# Altium PCB PCB1.PcbDoc (part 1 of 3)
Units mil, origin at the board's own origin, x right, y up, seen from the top; angles counter-clockwise.
Board outline 3935 x 3335 mil, 2 copper layers (Top Layer, Bottom Layer); 149 components, 220 nets, 928 pads, 357 vias.
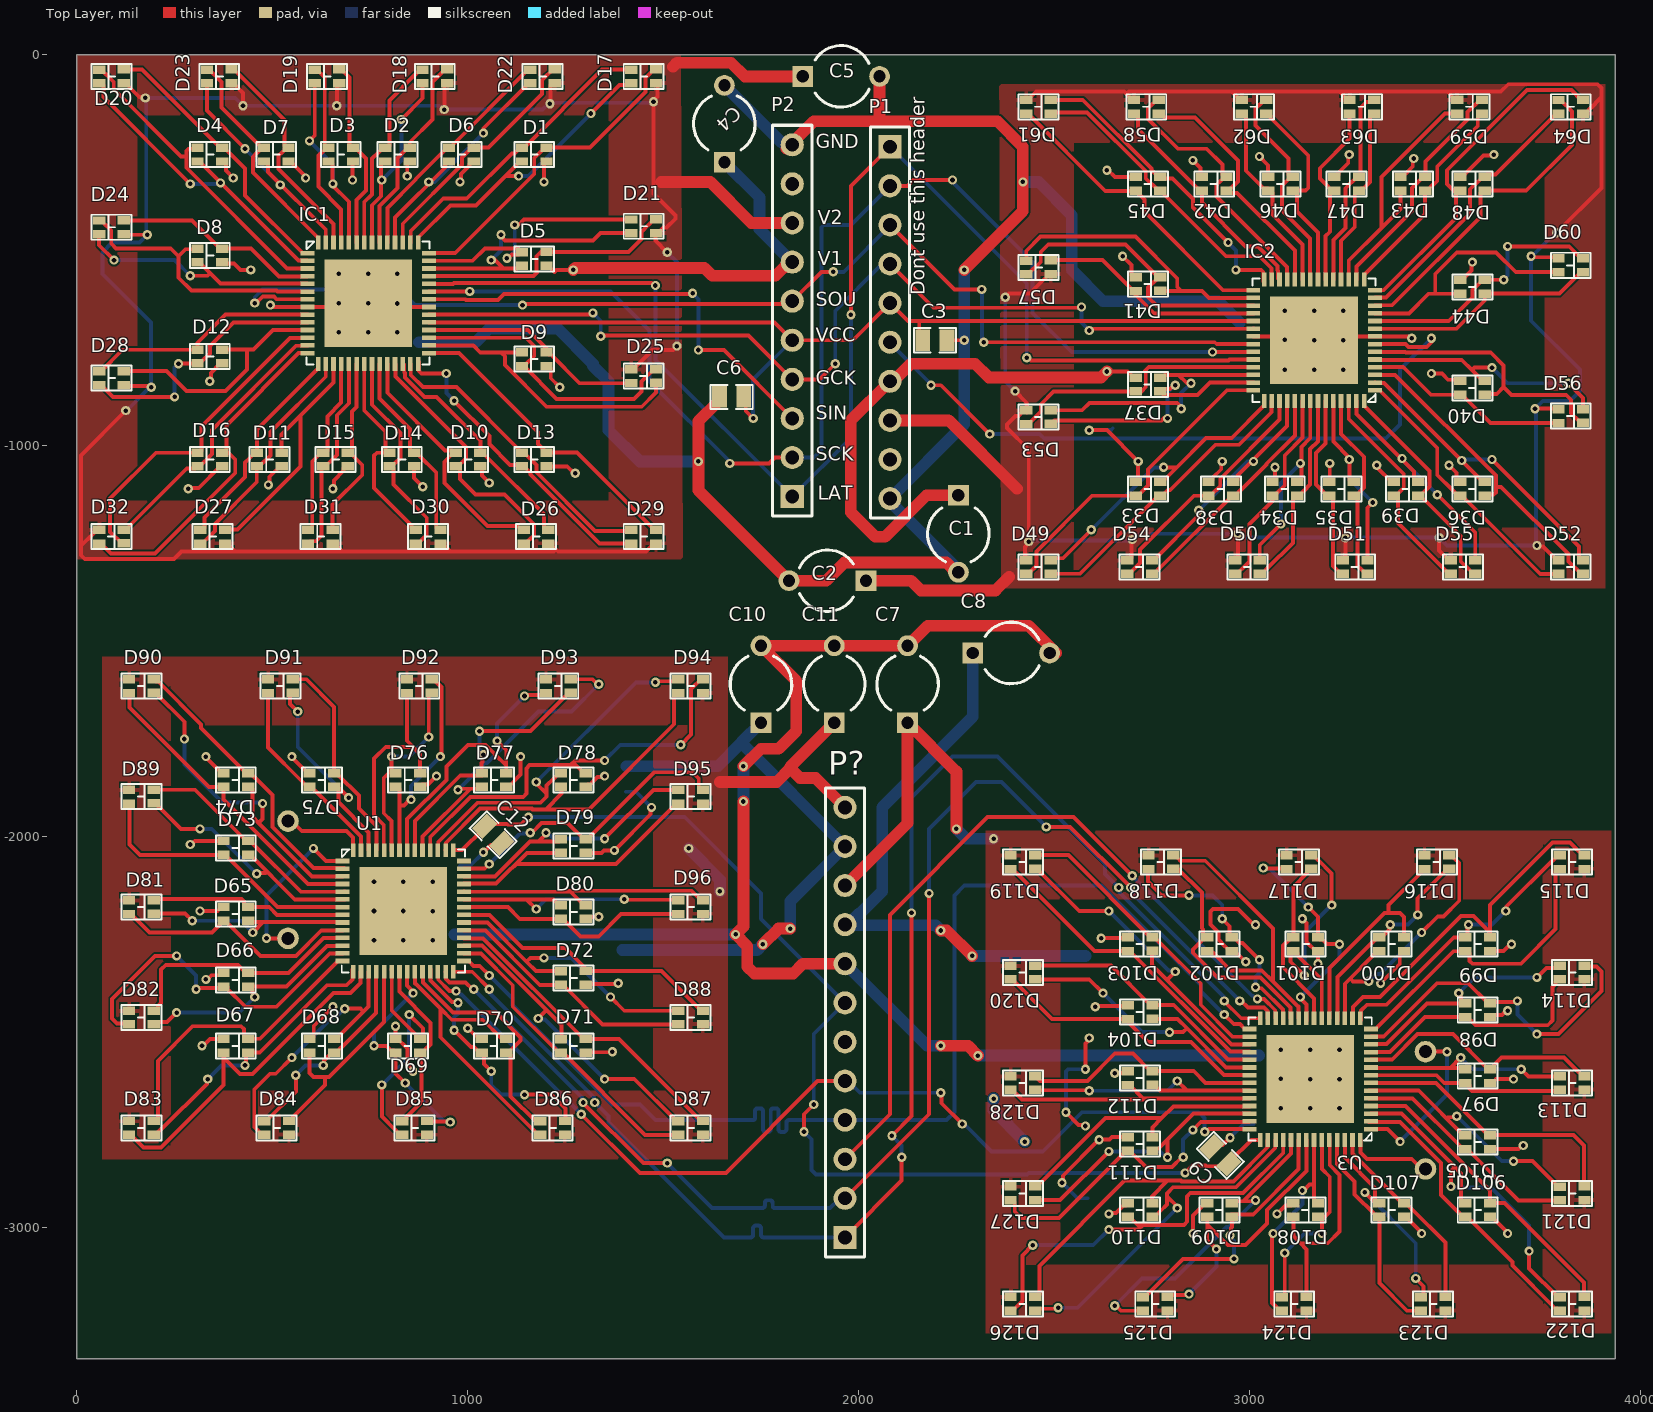
[diagram p0: Top Layer view]
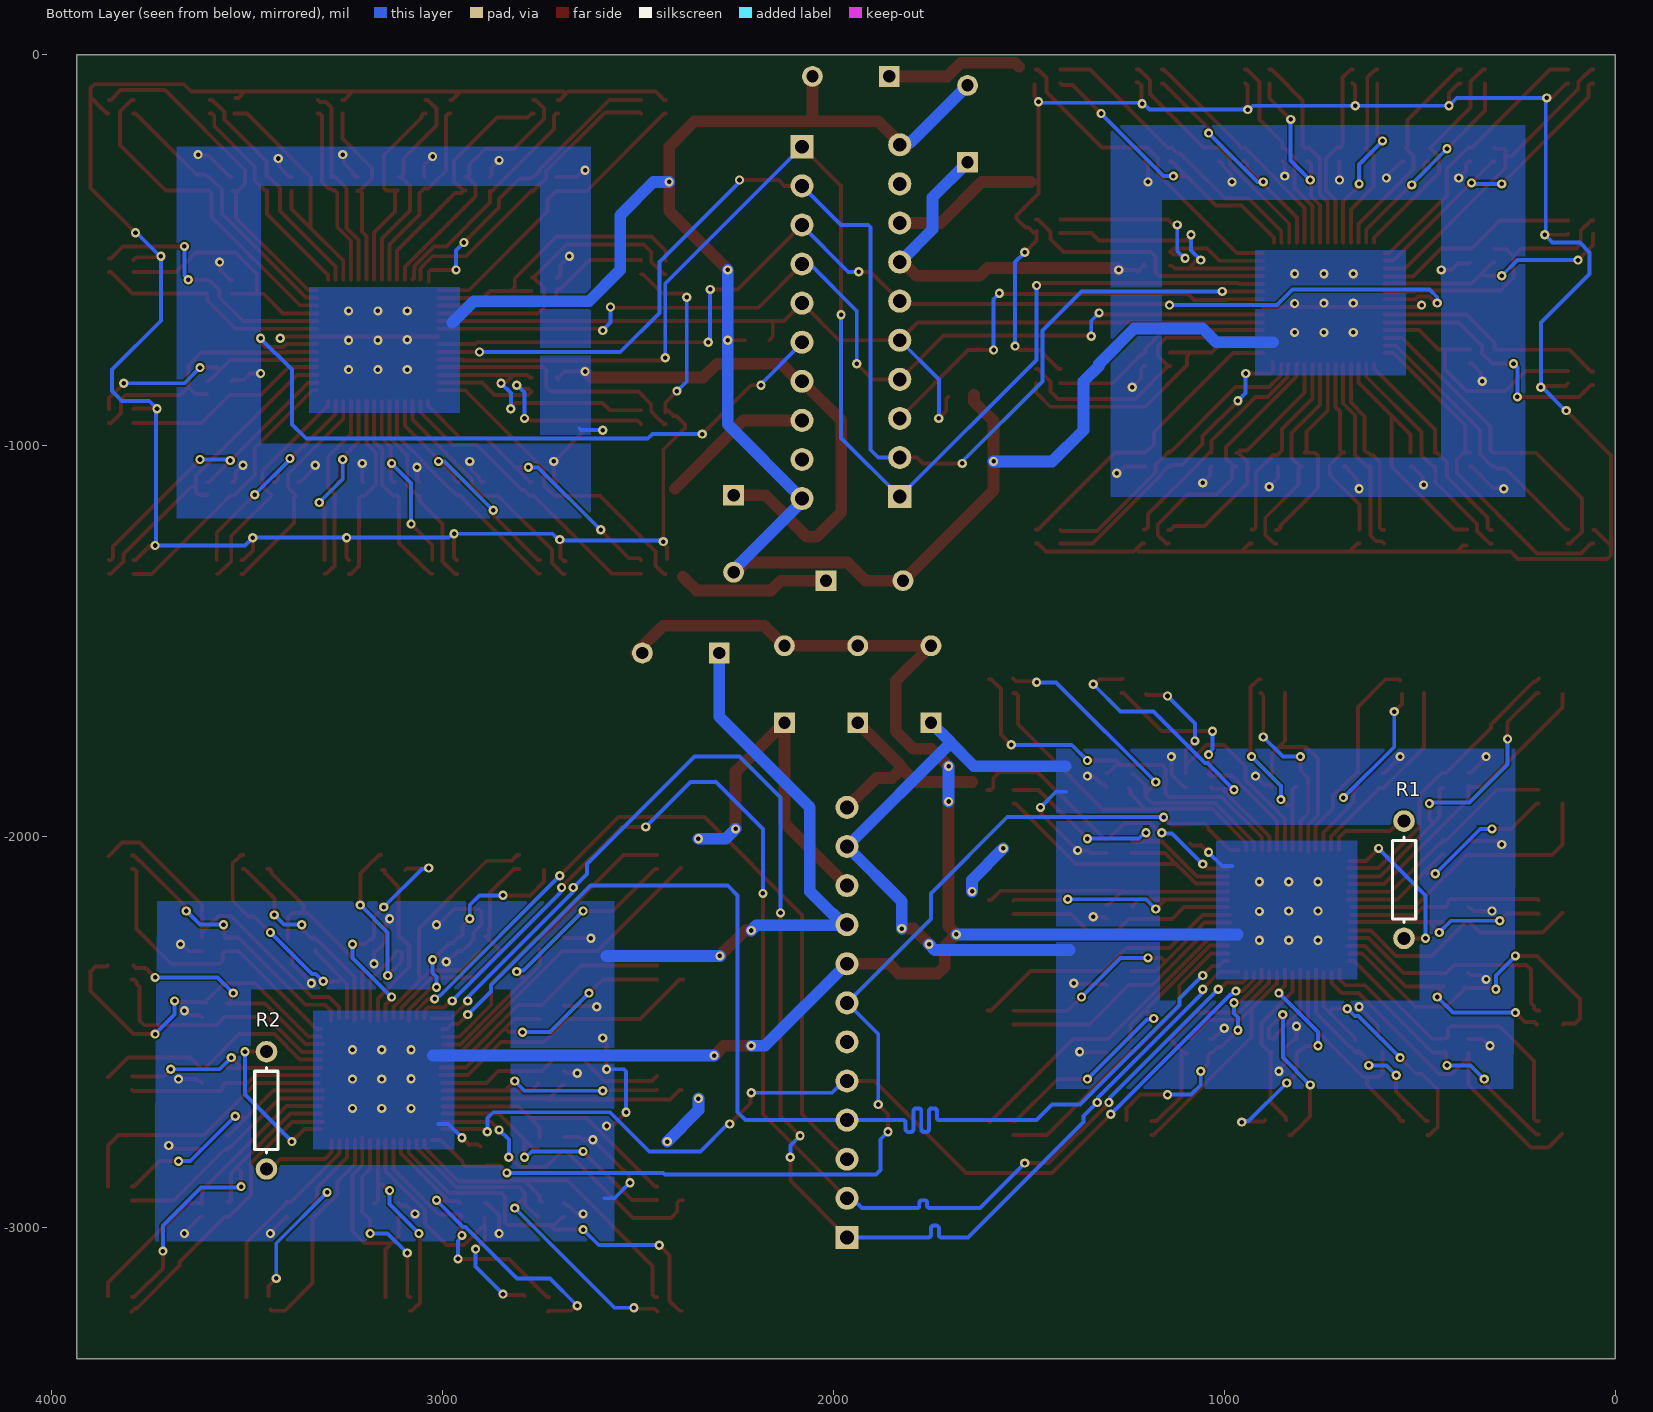
[diagram p1: Bottom Layer view, seen from below]

## Layer stack, top to bottom
Top Solder: solder mask 0.4, Solder Resist, Dk 3.5
Top Layer: signal copper 1.4
Dielectric 1: dielectric 12.6, FR-4, Dk 4.8
Bottom Layer: signal copper 1.4
Bottom Solder: solder mask 0.4, Solder Resist, Dk 3.5

## Board outline
0,-3335 0,0 3935,0 3935,-3335

## Design rules (kind name [scope] priority, off if disabled: settings)
Clearance [All] p1: gap=5 ignorepadtopadclearanceinfootprint=FALSE except(0: Arc-Text Track-Text SMDPad-Text THPad-Text Via-Text Fill-Text Poly-Text Region-Text Text-Text)
MinimumSolderMaskSliver [All] p1: minsoldermaskwidth=0
PolygonConnect [All] p1: thpad.connectstyle=Relief thpad.reliefconductorwidth=10 thpad.reliefentries=4 thpad.polygonreliefangle="90 Angle" thpad.airgapwidth=10 smdpad.connectstyle=Relief smdpad.reliefconductorwidth=10 smdpad.reliefentries=4 smdpad.polygonreliefangle="90 Angle" smdpad.airgapwidth=10 via.connectstyle=Direct via.reliefconductorwidth=10 via.reliefentries=4 via.polygonreliefangle="90 Angle" via.airgapwidth=10
RoutingVias [All] p1: holewidth=11.81 width=23.62 viastyle="Through Hole" minholewidth=11.81 minwidth=23.62 maxholewidth=11.81 maxwidth=23.62
SilkToSilkClearance [All] p1: silktosilkclearance=0
SilkToSolderMaskClearance [IsPad] p1: minsilkscreentomaskgap=0 clearancetoexposedcopper=TRUE
SolderMaskExpansion [All] p1: expansion=4
UnConnectedPin UnConnectedPin_1 [InNet('+VIN_2')] p1:
UnConnectedPin [InNet('+VIN_1')] p2:
Width [All] p1: maxlimit=50 minlimit=10 preferedwidth=10
27 further rules are at their usual default settings.

## Classes and differential pairs
component class TLC59581: C7 C8 C9 D97 D98 D99 D100 D101 D102 D103 D104 D105 D106 D107 D108 D109 D110 D111 D112 D113 D114 D115 D116 D117 D118 D119 D120 D121 D122 D123 D124 D125 D126 D127 D128 P? R2 U3
component class Sheet3: C10 C11 C12 D65 D66 D67 D68 D69 D70 D71 D72 D73 D74 D75 D76 D77 D78 D79 D80 D81 D82 D83 D84 D85 D86 D87 D88 D89 D90 D91 D92 D93 D94 D95 D96 R1 U1
component class Sheet1: C1 C2 C3 D33 D34 D35 D36 D37 D38 D39 D40 D41 D42 D43 D44 D45 D46 D47 D48 D49 D50 D51 D52 D53 D54 D55 D56 D57 D58 D59 D60 D61 D62 D63 D64 IC2 P1
component class TLC5955: C4 C5 C6 D1 D2 D3 D4 D5 D6 D7 D8 D9 D10 D11 D12 D13 D14 D15 D16 D17 D18 D19 D20 D21 D22 D23 D24 D25 D26 D27 D28 D29 D30 D31 D32 IC1 P2

## Components (designator, comment, footprint, x,y, rotation, side; value= is the part's Value field where it differs from the comment)
C1 "Cap2" CAPR5-4X5 2255,-1225 r270 top value=100pF
C2 "Cap2" CAPR5-4X5 1920,-1345 r180 top value=100pF
C3 "0805 Capacitor" "0805 Capacitor" 2195,-730 r180 top
C4 "Cap2" CAPR5-4X5 1656.46,-176.46 r90 top value=100pF
C5 "Cap2" CAPR5-4X5 1955,-55 r0 top value=100pF
C6 "0805 Capacitor" "0805 Capacitor" 1675,-875 r0 top
C7 "Cap2" CAPR5-4X5 2125,-1610 r90 top value=100pF
C8 "Cap2" CAPR5-4X5 2390,-1530 r0 top value=100pF
C9 "0805 Capacitor" "0805 Capacitor" 2925,-2815 r315 top
C10 "Cap2" CAPR5-4X5 1750,-1610 r90 top value=100pF
C11 "Cap2" CAPR5-4X5 1937.5,-1610 r90 top value=100pF
C12 "0805 Capacitor" "0805 Capacitor" 1065,-1995 r135 top
D1 "RGB 0603 LED" "RGB LED" 1170,-255 r0 top
D2 "RGB 0603 LED" "RGB LED" 820,-255 r0 top
D3 "RGB 0603 LED" "RGB LED" 675,-255 r0 top
D4 "RGB 0603 LED" "RGB LED" 340,-255 r0 top
D5 "RGB 0603 LED" "RGB LED" 1170,-521.67 r0 top
D6 "RGB 0603 LED" "RGB LED" 983.5,-255 r0 top
D7 "RGB 0603 LED" "RGB LED" 510,-255 r0 top
D8 "RGB 0603 LED" "RGB LED" 340,-513.33 r0 top
D9 "RGB 0603 LED" "RGB LED" 1170,-778.33 r0 top
D10 "RGB 0603 LED" "RGB LED" 1000.6,-1035 r0 top
D11 "RGB 0603 LED" "RGB LED" 492.4,-1035 r0 top
D12 "RGB 0603 LED" "RGB LED" 340,-771.67 r0 top
D13 "RGB 0603 LED" "RGB LED" 1170,-1035 r0 top
D14 "RGB 0603 LED" "RGB LED" 831.2,-1035 r0 top
D15 "RGB 0603 LED" "RGB LED" 661.8,-1035 r0 top
D16 "RGB 0603 LED" "RGB LED" 340,-1035 r0 top
D17 "RGB 0603 LED" "RGB LED" 1450,-55 r0 top
D18 "RGB 0603 LED" "RGB LED" 915.6,-55 r0 top
D19 "RGB 0603 LED" "RGB LED" 639.9,-55 r0 top
D20 "RGB 0603 LED" "RGB LED" 88.5,-55 r0 top
D21 "RGB 0603 LED" "RGB LED" 1450,-438.33 r0 top
D22 "RGB 0603 LED" "RGB LED" 1191.3,-55 r0 top
D23 "RGB 0603 LED" "RGB LED" 364.2,-55 r0 top
D24 "RGB 0603 LED" "RGB LED" 88.5,-440.91 r0 top
D25 "RGB 0603 LED" "RGB LED" 1450,-821.67 r180 top
D26 "RGB 0603 LED" "RGB LED" 1174.3,-1232.28 r0 top
D27 "RGB 0603 LED" "RGB LED" 347.2,-1232.28 r0 top
D28 "RGB 0603 LED" "RGB LED" 88.5,-826.81 r0 top
D29 "RGB 0603 LED" "RGB LED" 1450,-1232.28 r0 top
D30 "RGB 0603 LED" "RGB LED" 898.6,-1232.28 r0 top
D31 "RGB 0603 LED" "RGB LED" 622.9,-1232.28 r0 top
D32 "RGB 0603 LED" "RGB LED" 88.5,-1232.28 r180 top
D33 "RGB 0603 LED" "RGB LED" 2740,-1110 r180 top
D34 "RGB 0603 LED" "RGB LED" 3090,-1110 r180 top
D35 "RGB 0603 LED" "RGB LED" 3235,-1110 r180 top
D36 "RGB 0603 LED" "RGB LED" 3570,-1110 r180 top
D37 "RGB 0603 LED" "RGB LED" 2740,-843.33 r180 top
D38 "RGB 0603 LED" "RGB LED" 2926.5,-1110 r180 top
D39 "RGB 0603 LED" "RGB LED" 3400,-1110 r180 top
D40 "RGB 0603 LED" "RGB LED" 3570,-851.67 r180 top
D41 "RGB 0603 LED" "RGB LED" 2740,-586.67 r180 top
D42 "RGB 0603 LED" "RGB LED" 2909.4,-330 r180 top
D43 "RGB 0603 LED" "RGB LED" 3417.6,-330 r180 top
D44 "RGB 0603 LED" "RGB LED" 3570,-593.33 r180 top
D45 "RGB 0603 LED" "RGB LED" 2740,-330 r180 top
D46 "RGB 0603 LED" "RGB LED" 3078.8,-330 r180 top
D47 "RGB 0603 LED" "RGB LED" 3248.2,-330 r180 top
D48 "RGB 0603 LED" "RGB LED" 3570,-330 r180 top
D49 "RGB 0603 LED" "RGB LED" 2460,-1310 r180 top
D50 "RGB 0603 LED" "RGB LED" 2994.4,-1310 r180 top
D51 "RGB 0603 LED" "RGB LED" 3270.1,-1310 r180 top
D52 "RGB 0603 LED" "RGB LED" 3821.5,-1310 r180 top
D53 "RGB 0603 LED" "RGB LED" 2460,-926.67 r180 top
D54 "RGB 0603 LED" "RGB LED" 2718.7,-1310 r180 top
D55 "RGB 0603 LED" "RGB LED" 3545.8,-1310 r180 top
D56 "RGB 0603 LED" "RGB LED" 3821.5,-924.09 r180 top
D57 "RGB 0603 LED" "RGB LED" 2460,-543.33 r0 top
D58 "RGB 0603 LED" "RGB LED" 2735.7,-132.72 r180 top
D59 "RGB 0603 LED" "RGB LED" 3562.8,-132.72 r180 top
D60 "RGB 0603 LED" "RGB LED" 3821.5,-538.19 r180 top
D61 "RGB 0603 LED" "RGB LED" 2460,-132.72 r180 top
D62 "RGB 0603 LED" "RGB LED" 3011.4,-132.72 r180 top
D63 "RGB 0603 LED" "RGB LED" 3287.1,-132.72 r180 top
D64 "RGB 0603 LED" "RGB LED" 3821.5,-132.72 r0 top
D65 "RGB 0603 LED" "RGB LED" 406.5,-2197.5 r180 top
D66 "RGB 0603 LED" "RGB LED" 406.5,-2366.25 r180 top
D67 "RGB 0603 LED" "RGB LED" 406.5,-2535 r180 top
D68 "RGB 0603 LED" "RGB LED" 626.62,-2535 r180 top
D69 "RGB 0603 LED" "RGB LED" 846.75,-2535 r180 top
D70 "RGB 0603 LED" "RGB LED" 1066.87,-2535 r180 top
D71 "RGB 0603 LED" "RGB LED" 1270,-2535 r0 top
D72 "RGB 0603 LED" "RGB LED" 1270,-2361.25 r0 top
D73 "RGB 0603 LED" "RGB LED" 406.5,-2028.75 r180 top
D74 "RGB 0603 LED" "RGB LED" 406.5,-1855 r180 top
D75 "RGB 0603 LED" "RGB LED" 626.62,-1855 r180 top
D76 "RGB 0603 LED" "RGB LED" 846.75,-1855 r0 top
D77 "RGB 0603 LED" "RGB LED" 1066.87,-1855 r0 top
D78 "RGB 0603 LED" "RGB LED" 1270,-1855 r0 top
D79 "RGB 0603 LED" "RGB LED" 1270,-2023.75 r0 top
D80 "RGB 0603 LED" "RGB LED" 1270,-2192.5 r0 top
D81 "RGB 0603 LED" "RGB LED" 165,-2180 r180 top
D82 "RGB 0603 LED" "RGB LED" 165,-2462.5 r180 top
D83 "RGB 0603 LED" "RGB LED" 165,-2745 r180 top
D84 "RGB 0603 LED" "RGB LED" 511,-2745 r0 top
D85 "RGB 0603 LED" "RGB LED" 864,-2745 r0 top
D86 "RGB 0603 LED" "RGB LED" 1217,-2745 r0 top
D87 "RGB 0603 LED" "RGB LED" 1570,-2745 r0 top
D88 "RGB 0603 LED" "RGB LED" 1570,-2462.5 r0 top
D89 "RGB 0603 LED" "RGB LED" 165,-1897.5 r180 top
D90 "RGB 0603 LED" "RGB LED" 165,-1615 r180 top
D91 "RGB 0603 LED" "RGB LED" 520.5,-1615 r180 top
D92 "RGB 0603 LED" "RGB LED" 876,-1615 r180 top
D93 "RGB 0603 LED" "RGB LED" 1231.5,-1615 r180 top
D94 "RGB 0603 LED" "RGB LED" 1570,-1615 r0 top
D95 "RGB 0603 LED" "RGB LED" 1570,-1897.5 r0 top
D96 "RGB 0603 LED" "RGB LED" 1570,-2180 r0 top
D97 "RGB 0603 LED" "RGB LED" 3583.5,-2612.5 r0 top
D98 "RGB 0603 LED" "RGB LED" 3583.5,-2443.75 r0 top
D99 "RGB 0603 LED" "RGB LED" 3583.5,-2275 r0 top
D100 "RGB 0603 LED" "RGB LED" 3363.38,-2275 r0 top
D101 "RGB 0603 LED" "RGB LED" 3143.25,-2275 r0 top
D102 "RGB 0603 LED" "RGB LED" 2923.13,-2275 r0 top
D103 "RGB 0603 LED" "RGB LED" 2720,-2275 r180 top
D104 "RGB 0603 LED" "RGB LED" 2720,-2448.75 r180 top
D105 "RGB 0603 LED" "RGB LED" 3583.5,-2781.25 r0 top
D106 "RGB 0603 LED" "RGB LED" 3583.5,-2955 r0 top
D107 "RGB 0603 LED" "RGB LED" 3363.38,-2955 r0 top
D108 "RGB 0603 LED" "RGB LED" 3143.25,-2955 r180 top
D109 "RGB 0603 LED" "RGB LED" 2923.13,-2955 r180 top
D110 "RGB 0603 LED" "RGB LED" 2720,-2955 r180 top
D111 "RGB 0603 LED" "RGB LED" 2720,-2786.25 r180 top
D112 "RGB 0603 LED" "RGB LED" 2720,-2617.5 r180 top
D113 "RGB 0603 LED" "RGB LED" 3825,-2630 r0 top
D114 "RGB 0603 LED" "RGB LED" 3825,-2347.5 r0 top
D115 "RGB 0603 LED" "RGB LED" 3825,-2065 r0 top
D116 "RGB 0603 LED" "RGB LED" 3479,-2065 r180 top
D117 "RGB 0603 LED" "RGB LED" 3126,-2065 r180 top
D118 "RGB 0603 LED" "RGB LED" 2773,-2065 r180 top
D119 "RGB 0603 LED" "RGB LED" 2420,-2065 r180 top
D120 "RGB 0603 LED" "RGB LED" 2420,-2347.5 r180 top
D121 "RGB 0603 LED" "RGB LED" 3825,-2912.5 r0 top
D122 "RGB 0603 LED" "RGB LED" 3825,-3195 r0 top
D123 "RGB 0603 LED" "RGB LED" 3469.5,-3195 r0 top
D124 "RGB 0603 LED" "RGB LED" 3114,-3195 r0 top
D125 "RGB 0603 LED" "RGB LED" 2758.5,-3195 r0 top
D126 "RGB 0603 LED" "RGB LED" 2420,-3195 r180 top
D127 "RGB 0603 LED" "RGB LED" 2420,-2912.5 r180 top
D128 "RGB 0603 LED" "RGB LED" 2420,-2630 r180 top
IC1 "TLC5955" TLC5955 745,-635 r0 top
IC2 "TLC5955" TLC5955 3165,-730 r180 top
P1 "Header 10" HDR1X10 2080,-235 r270 top
P2 "Header 10" HDR1X10 1830,-1130 r90 top
P? "Header 12" HDR1X12 1965,-3025 r90 top
R1 "Res1" AXIAL-0.3 540,-2110 r90 bottom
R2 "Res1" AXIAL-0.3 3450,-2700 r270 bottom
U1 "TLC59581" TLC59581 835,-2190 r0 top
U3 "TLC59581" TLC59581 3155,-2620 r180 top (schematic designator IC3)

## Footprints (in the part's own frame and the unit in brackets; to place one, negate y for a bottom-side part, rotate by r counter-clockwise, add the part's x,y. Pads: shape width x height; smd on the part's side, far side on the other; paste and mask are expansions set on the pad)
"0805 Capacitor" [mm]
  rect 0.96x1.39 smd: 1(-0.79,0) 2(0.79,0)
  silkscreen extent -1.37,-0.79 1.37,0.79, body extent -1,-0.63 1,0.63, height 1.35
AXIAL-0.3 [mm] "Axial Device, Thru-Hole; 2 Leads; 0.3 in Pin Spacing"
  round 1.4 hole 0.85: 1(-3.81,0) 2(3.81,0)
  silkscreen extent -2.77,-0.76 2.77,0.76
CAPR5-4X5 [mm] "Capacitor; 2 Leads"
  rect 1.35x1.35 hole 0.8: 1(-2.5,0)
  round 1.35 hole 0.8: 2(2.5,0)
  silkscreen extent -1.69,-2 1.82,2
HDR1X10 [mm] "Connector; Header; 10 Position"
  rect 1.5x1.5 hole 0.9: 1(0,0)
  round 1.5 hole 0.9: 2(2.54,0) 3(5.08,0) 4(7.62,0) 5(10.16,0) 6(12.7,0) 7(15.24,0) 8(17.78,0) 9(20.32,0) 10(22.86,0)
  silkscreen extent -1.27,-1.27 24.13,1.27
HDR1X12 [mm] "Connector; Header; 12 Position"
  rect 1.5x1.5 hole 0.9: 1(0,0)
  round 1.5 hole 0.9: 2(2.54,0) 3(5.08,0) 4(7.62,0) 5(10.16,0) 6(12.7,0) 7(15.24,0) 8(17.78,0) 9(20.32,0) 10(22.86,0) 11(25.4,0) 12(27.94,0)
  silkscreen extent -1.27,-1.27 29.21,1.27
"RGB LED" [mm]
  rect 0.8x0.55 smd: 1(-0.8,-0.45) 2(-0.8,0.439) 3(0.8,0.45) 4(0.8,-0.45)
  round 0.381 on Top Overlay: ""(1.6,-0.66)
  silkscreen extent -1.3,-0.81 1.3,0.81
TLC5955 [mm]
  rect 0.9x0.3 smd: 1(-3.95,3.25) 2(-3.95,2.75) 3(-3.95,2.25) 4(-3.95,1.75) 5(-3.95,1.25) 6(-3.95,0.75) 7(-3.95,0.25) 8(-3.95,-0.25) 9(-3.95,-0.75) 10(-3.95,-1.25) 11(-3.95,-1.75) 12(-3.95,-2.25) 13(-3.95,-2.75) 14(-3.95,-3.25) 29(3.95,-3.25) 30(3.95,-2.75) 31(3.95,-2.25) 32(3.95,-1.75) 33(3.95,-1.25) 34(3.95,-0.75) 35(3.95,-0.25) 36(3.95,0.25) 37(3.95,0.75) 38(3.95,1.25) 39(3.95,1.75) 40(3.95,2.25) 41(3.95,2.75) 42(3.95,3.25)
  rect 0.3x0.9 smd: 15(-3.25,-3.95) 16(-2.75,-3.95) 17(-2.25,-3.95) 18(-1.75,-3.95) 19(-1.25,-3.95) 20(-0.75,-3.95) 21(-0.25,-3.95) 22(0.25,-3.95) 23(0.75,-3.95) 24(1.25,-3.95) 25(1.75,-3.95) 26(2.25,-3.95) 27(2.75,-3.95) 28(3.25,-3.95) 43(3.25,3.95) 44(2.75,3.95) 45(2.25,3.95) 46(1.75,3.95) 47(1.25,3.95) 48(0.75,3.95) 49(0.25,3.95) 50(-0.25,3.95) 51(-0.75,3.95) 52(-1.25,3.95) 53(-1.75,3.95) 54(-2.25,3.95) 55(-2.75,3.95) 56(-3.25,3.95)
  rect 5.7x5.7 smd: 57(0,0)
  silkscreen extent -4,-4 4,4, body extent -4.05,-4.05 4.05,4.05, height 1
TLC59581 [mm]
  rect 0.9x0.3 smd: 1(-3.95,3.25) 2(-3.95,2.75) 3(-3.95,2.25) 4(-3.95,1.75) 5(-3.95,1.25) 6(-3.95,0.75) 7(-3.95,0.25) 8(-3.95,-0.25) 9(-3.95,-0.75) 10(-3.95,-1.25) 11(-3.95,-1.75) 12(-3.95,-2.25) 13(-3.95,-2.75) 14(-3.95,-3.25) 29(3.95,-3.25) 30(3.95,-2.75) 31(3.95,-2.25) 32(3.95,-1.75) 33(3.95,-1.25) 34(3.95,-0.75) 35(3.95,-0.25) 36(3.95,0.25) 37(3.95,0.75) 38(3.95,1.25) 39(3.95,1.75) 40(3.95,2.25) 41(3.95,2.75) 42(3.95,3.25)
  rect 0.3x0.9 smd: 15(-3.25,-3.95) 16(-2.75,-3.95) 17(-2.25,-3.95) 18(-1.75,-3.95) 19(-1.25,-3.95) 20(-0.75,-3.95) 21(-0.25,-3.95) 22(0.25,-3.95) 23(0.75,-3.95) 24(1.25,-3.95) 25(1.75,-3.95) 26(2.25,-3.95) 27(2.75,-3.95) 28(3.25,-3.95) 43(3.25,3.95) 44(2.75,3.95) 45(2.25,3.95) 46(1.75,3.95) 47(1.25,3.95) 48(0.75,3.95) 49(0.25,3.95) 50(-0.25,3.95) 51(-0.75,3.95) 52(-1.25,3.95) 53(-1.75,3.95) 54(-2.25,3.95) 55(-2.75,3.95) 56(-3.25,3.95)
  rect 5.7x5.7 smd: 57(0,0)
  silkscreen extent -4,-4 4,4, body extent -4.05,-4.05 4.05,4.05, height 1

## Part data
C1 C2 C4 C5 C7 C8 C10 C11: "Capacitor", PackageDescription="Capacitor; 2 Leads", PackageReference=CAPR5-4X5, Published=23-Sep-2002, Publisher="Altium Limited"
P1 P2: "Header, 10-Pin", LatestRevisionDate=17-Jul-2002, LatestRevisionNote="Re-released for DXP Platform.", Publisher="Altium Limited"
P?: "Header, 12-Pin", LatestRevisionDate=17-Jul-2002, LatestRevisionNote="Re-released for DXP Platform.", Publisher="Altium Limited"
R1 R2: "Resistor", LatestRevisionDate=17-Jul-2002, LatestRevisionNote="Re-released for DXP Platform.", PackageDescription="Axial Device, Thru-Hole; 2 Leads; 0.3 in Pin Spacing", PackageReference=AXIAL-0.3, Published=8-Jun-2000, Publisher="Altium Limited"

## Via types
v1: diameter 23.62, hole 11.81, Top Layer to Bottom Layer, 357 vias

## Nets (pads, with @x,y where several pads share a name; then routed paths per layer and width w, separated by ;. In a path a pad name is that pad's centre, name@x,y a point inside that pad or via, vN(x,y) a via of type N, cw(c..) or ccw(c..) an arc to the next point about the centre after c; other vN are vias at no path point)
1_ERROR: U1.42
1_GCLK: P?.4 U1.29 U3.29 | length 3133.8
  Top Layer w10: U1.29@990.51,-2317.95 1002.32,-2317.95 1014.88,-2330.51 1030.51,-2330.51 v1(1055,-2355) ; v1(2935,-2455) 2959.49,-2479.49 2975.12,-2479.49 2987.68,-2492.05 U3.29@2999.49,-2492.05
  Bottom Layer w10: v1(1055,-2355) 1114.29,-2414.29 1114.29,-2430.13 1369.15,-2685 1440,-2685 1480,-2725 1725,-2725 1728,-2725 ccw(c1728,-2718) 1735,-2718 1735,-2702 cw(c1742,-2702) 1742,-2695 1748,-2695 cw(c1748,-2702) 1755,-2702 1755,-2725 1755,-2748 ccw(c1762,-2748) 1762,-2755 1768,-2755 ccw(c1768,-2748) 1775,-2748 1775,-2725 1775,-2702 cw(c1782,-2702) 1782,-2695 1788,-2695 cw(c1788,-2702) 1795,-2702 1795,-2725 1795,-2748 ccw(c1802,-2748) 1802,-2755 1808,-2755 ccw(c1808,-2748) 1815,-2748 1815,-2732 cw(c1822,-2732) 1822,-2725 1830,-2725 P?.4@1965,-2725 ; P?.4@1965,-2730 1970,-2725 2225,-2725 2245,-2705 2245,-2150 2270,-2125 2620.85,-2125 2875.71,-2379.87 2875.71,-2395.71 v1(2935,-2455)
1_GND: C7.2 C8.2 C9.1 C10.2 C11.2 C12.1 P?.8 U1.57 U3.57 | length 4190.3
  Top Layer w10: v1(1040,-2040) 1058.96,-2021.04 1059.42,-2021.04 1061.35,-2022.98 1081.01,-2022.98 C12.1@1086.99,-2016.99 ; C9.1@2903.01,-2793.01 2908.99,-2787.02 2928.65,-2787.02 2930.58,-2788.96 2931.04,-2788.96 v1(2950,-2770)
  Top Layer w30: v1(1705,-1910) 1705,-2230 v1(1685,-2250) 1715,-2280 1715,-2332.43 1732.57,-2350 1832.36,-2350 1857.36,-2325 P?.8@1965,-2325 1970,-2325 P?.8@1975,-2330 ; v1(1705,-1820) 1750,-1775 1795,-1775 1840,-1730 1840,-1601.57 C10.2@1750,-1511.57 ; C10.2@1750,-1510 C10.2@1750,-1511.57 ; v1(2210,-2535) 2280,-2535 v1(2305,-2560) ; C8.2@2505,-1530 2435,-1460 2176.57,-1460 C7.2@2125,-1511.57 C11.2@1937.5,-1511.57 C10.2@1750,-1511.57
  Bottom Layer w10: 980,-2075 1005,-2075 v1(1040,-2040) ; v1(2950,-2770) 2985,-2735 3010,-2735
  Bottom Layer w30: 965,-2250 v1(1685,-2250) ; v1(1705,-1910) v1(1705,-1820) ; P?.8@1965,-2325 2175,-2535 v1(2210,-2535) ; v1(2305,-2560) 3025,-2560
  other v1: 3080,-2695 3155,-2695 3230,-2695 3155,-2620 3230,-2620 3080,-2619 3080,-2545 3155,-2545 3230,-2545 760,-2265 835,-2265 910,-2265 910,-2191 760,-2190 835,-2190 760,-2115 835,-2115 910,-2115
1_LAT: P?.2 U1.27 U3.27 | length 3564
  Top Layer w10: U1.27@943.27,-2345.51 944.17,-2346.42 944.17,-2364.5 952.91,-2373.23 994.54,-2373.23 1011.31,-2390 v1(1015,-2390) ; v1(1295,-2680) 1295,-2680.85 1449.15,-2835 v1(1510,-2835) ; P?.2@1965,-2925 2180,-2710 v1(2180,-2145) ; v1(2480,-1975) 2540.85,-1975 2695,-2129.15 v1(2695,-2130) ; v1(2975,-2420) 2978.69,-2420 2995.46,-2436.77 3037.09,-2436.77 3045.83,-2445.5 3045.83,-2463.58 U3.27@3046.73,-2464.49
  Bottom Layer w10: v1(1015,-2390) 1292.39,-2667.39 1292.39,-2682.39 v1@1295,-2685 ; v1(1510,-2835) 1625,-2950 1750,-2950 1753,-2950 ccw(c1753,-2943) 1760,-2943 1760,-2937 cw(c1767,-2937) 1767,-2930 1773,-2930 cw(c1773,-2937) 1780,-2937 1780,-2945 ccw(c1785,-2945) 1785,-2950 1927.03,-2950 1947.03,-2930 P?.2@1975,-2930 ; v1(2180,-2145) 2180,-1980 2300,-1860 2365,-1860 v1(2480,-1975) ; v1@2695,-2125 2697.61,-2127.61 2697.61,-2142.61 v1(2975,-2420)
1_OUTB0: D97.3 D113.3 U3.10 | length 642.2
  Top Layer w10: U3.10@3310,-2570 3365,-2570 3430,-2505 3520.3,-2505 3610.08,-2594.78 D97.3@3615,-2594.78 3644.78,-2565 3804.29,-2565 3854.29,-2615 D113.3@3855,-2615
1_OUTB0_1: D65.3 D81.3 U1.10 | length 642.2
  Top Layer w10: D81.3@135,-2195 135.71,-2195 185.71,-2245 345.22,-2245 D65.3@375,-2215.22 379.92,-2215.22 469.7,-2305 560,-2305 625,-2240 U1.10@680,-2240
1_OUTB1: D98.3 D114.3 U3.13 | length 871.2
  Top Layer w10: U3.13@3310.51,-2511.73 3311.42,-2510.83 3343.23,-2510.83 3479.06,-2375 3559.05,-2375 D98.3@3607.02,-2422.98 ; D98.3@3605,-2425 D98.3@3607.02,-2422.98 ; v1(3685,-2420) 3682.39,-2422.61 3607.39,-2422.61 D98.3@3607.02,-2422.98 ; v1(3735,-2505) 3790,-2505 3900,-2395 3900,-2345 3887.24,-2332.24 3858.96,-2332.24 D114.3@3856.5,-2329.78
  Bottom Layer w10: v1(3685,-2420) 3685,-2455 v1(3735,-2505)
1_OUTB1_1: D66.3 D82.3 U1.13 | length 871.2
  Top Layer w10: D82.3@133.5,-2480.22 131.04,-2477.76 102.76,-2477.76 90,-2465 90,-2415 200,-2305 v1(255,-2305) ; v1(305,-2390) 307.61,-2387.39 382.61,-2387.39 D66.3@382.98,-2387.02 ; D66.3@385,-2385 D66.3@382.98,-2387.02 ; U1.13@679.49,-2298.27 678.58,-2299.17 646.77,-2299.17 510.94,-2435 430.95,-2435 D66.3@382.98,-2387.02
  Bottom Layer w10: v1(255,-2305) 305,-2355 v1(305,-2390)
1_OUTB2: D99.3 D115.3 U3.16 | length 895.9
  Top Layer w10: U3.16@3263.27,-2464.49 3264.17,-2463.58 3264.17,-2435.83 3290,-2410 3333.79,-2410 3540.6,-2203.19 3573.19,-2203.19 3615,-2245 ; D99.3@3615,-2257.28 3615,-2245 ; D115.3@3854.29,-2050 3819.29,-2015 3775,-2015 3615,-2175 3615,-2245
1_OUTB2_1: D67.3 D83.3 U1.16 | length 895.9
  Top Layer w10: D83.3@135.71,-2760 170.71,-2795 215,-2795 375,-2635 375,-2565 ; D67.3@375,-2552.72 375,-2565 ; U1.16@726.73,-2345.51 725.83,-2346.42 725.83,-2374.17 700,-2400 656.21,-2400 449.4,-2606.81 416.81,-2606.81 375,-2565
1_OUTB3: D100.3 D116.3 U3.19 | length 590.4
  Top Layer w10: U3.19@3204.21,-2464.49 3204.21,-2335.79 3345,-2195 3355,-2195 ; D100.3@3395,-2260 3395,-2205 3385,-2195 3355,-2195 ; D116.3@3447.5,-2082.72 3442.58,-2082.72 3436.76,-2088.54 3436.76,-2093.46 3355,-2175.22 3355,-2195
1_OUTB3_1: D68.3 D84.3 U1.19 | length 590.4
  Top Layer w10: D84.3@542.5,-2727.28 547.42,-2727.28 553.24,-2721.46 553.24,-2716.54 635,-2634.78 635,-2615 ; D68.3@595,-2550 595,-2605 605,-2615 635,-2615 ; U1.19@785.79,-2345.51 785.79,-2474.21 645,-2615 635,-2615
1_OUTB4: D101.3 D117.3 U3.22 | length 611.4
  Top Layer w10: v1(3035,-2080) 3036.36,-2081.36 3091.36,-2081.36 D117.3@3095,-2085 ; v1(3130,-2410) 3130,-2413.69 3145.16,-2428.84 U3.22@3145.16,-2464.49 3145.16,-2469.84 U3.22@3145,-2470 ; v1(3150,-2180) 3174.75,-2204.75 D101.3@3174.75,-2257.28 3180.57,-2263.11 3185.86,-2263.11 3197.75,-2275 v1(3230,-2275)
  Bottom Layer w10: v1(3035,-2080) 3037.61,-2082.61 3052.61,-2082.61 v1(3150,-2180) ; v1(3130,-2410) 3230,-2310 v1(3230,-2275)
1_OUTB4_1: D69.3 D85.3 U1.22 | length 611.4
  Top Layer w10: v1(760,-2535) 792.25,-2535 804.14,-2546.89 809.43,-2546.89 D69.3@815.25,-2552.72 815.25,-2605.25 v1(840,-2630) ; U1.22@845,-2340 844.84,-2340.16 U1.22@844.84,-2345.51 844.84,-2381.16 860,-2396.31 v1(860,-2400) ; D85.3@895,-2725 898.64,-2728.64 953.64,-2728.64 v1(955,-2730)
  Bottom Layer w10: v1(760,-2535) 760,-2500 v1(860,-2400) ; v1(840,-2630) 937.39,-2727.39 952.39,-2727.39 v1(955,-2730)
1_OUTB5: D102.3 D118.3 U3.25 | length 627.1
  Top Layer w10: D118.3@2740,-2085 2740,-2114.86 2775.14,-2150 v1(2845,-2150) ; v1(2930,-2210) 2948.96,-2228.96 2948.96,-2251.62 D102.3@2954.62,-2257.28 2959.54,-2257.28 2974.15,-2271.89 2981.89,-2271.89 v1(3025,-2315) ; v1(3015,-2385) 3017.61,-2387.61 3030.36,-2387.61 3085,-2442.25 U3.25@3085,-2470
  Bottom Layer w10: v1(2845,-2150) 2905,-2150 2930,-2175 v1(2930,-2210) ; v1(3015,-2385) 3015,-2358.19 3025,-2348.19 v1(3025,-2315)
1_OUTB5_1: D70.3 D86.3 U1.25 | length 627.1
  Top Layer w10: U1.25@905,-2340 905,-2367.75 959.64,-2422.39 972.39,-2422.39 v1(975,-2425) ; v1(965,-2495) 1008.11,-2538.11 1015.85,-2538.11 1030.46,-2552.72 D70.3@1035.38,-2552.72 1041.04,-2558.38 1041.04,-2581.04 v1(1060,-2600) ; v1(1145,-2660) 1214.86,-2660 1250,-2695.14 D86.3@1250,-2725
  Bottom Layer w10: v1(965,-2495) 965,-2461.81 975,-2451.81 v1(975,-2425) ; v1(1060,-2600) 1060,-2635 1085,-2660 v1(1145,-2660)
1_OUTB6: D103.3 D119.3 U3.32 | length 804.7
  Top Layer w10: D119.3@2390,-2080 2390.71,-2080 2603.43,-2292.72 D103.3@2688.5,-2292.72 2693.43,-2292.72 2950.71,-2550 U3.32@3000,-2550
1_OUTB6_1: D71.3 D87.3 U1.32 | length 804.7
  Top Layer w10: U1.32@990,-2260 1039.29,-2260 1296.57,-2517.28 D71.3@1301.5,-2517.28 1386.57,-2517.28 1599.29,-2730 D87.3@1600,-2730
1_OUTB7: D104.3 D120.3 U3.35 | length 725.7
  Top Layer w10: D120.3@2385,-2365 2393.21,-2365 2494.68,-2466.47 D104.3@2688.5,-2466.47 2688.5,-2473.5 2740,-2525 2850,-2525 2935,-2610 2999.33,-2610 U3.35@2999.49,-2610.16 3004.84,-2610.16 U3.35@3005,-2610
1_OUTB7_1: D72.3 D88.3 U1.35 | length 725.7
  Top Layer w10: U1.35@985,-2200 985.16,-2199.84 U1.35@990.51,-2199.84 990.67,-2200 1055,-2200 1140,-2285 1250,-2285 1301.5,-2336.5 D72.3@1301.5,-2343.53 1495.32,-2343.53 1596.79,-2445 D88.3@1605,-2445
1_OUTB8: D112.3 D128.3 U3.38 | length 683.1
  Top Layer w10: D128.3@2388.5,-2647.72 2393.43,-2647.72 2417.52,-2671.81 2733.19,-2671.81 2735,-2670 ; D112.3@2688.5,-2635.22 2693.43,-2635.22 2727.42,-2669.21 2999.21,-2669.21 U3.38@3000,-2670
1_OUTB8_1: D80.3 D96.3 U1.38 | length 683.1
  Top Layer w10: U1.38@990,-2140 990.79,-2140.79 1262.58,-2140.79 1296.57,-2174.78 D80.3@1301.5,-2174.78 ; 1255,-2140 1256.81,-2138.19 1572.48,-2138.19 1596.57,-2162.28 D96.3@1601.5,-2162.28
1_OUTB9: D111.3 D127.3 U3.41 | length 809.1
  Top Layer w10: D127.3@2385,-2930 2393.21,-2930 2399.25,-2936.04 2399.25,-2959.25 2415,-2975 2512.55,-2975 2683.58,-2803.97 D111.3@2688.5,-2803.97 2693.43,-2803.97 2734.46,-2845 2801.31,-2845 2826.31,-2820 v1(2830,-2820) ; v1(2855,-2750) 2875,-2730 U3.41@3000,-2730
  Bottom Layer w10: v1(2830,-2820) 2830,-2775 v1(2855,-2750)
1_OUTB9_1: D79.3 D95.3 U1.41 | length 775.8
  Top Layer w10: U1.41@990.51,-2081.73 1043.27,-2081.73 v1@1050,-2075 ; v1(1160,-1990) 1163.69,-1990 1188.69,-1965 1255.54,-1965 1296.57,-2006.03 D79.3@1301.5,-2006.03 1306.42,-2006.03 1477.45,-1835 1575,-1835 1590.75,-1850.75 1590.75,-1873.96 1596.79,-1880 D95.3@1605,-1880
  Bottom Layer w10: v1(1055,-2070) 1133.19,-1991.81 1158.19,-1991.81 v1(1160,-1990)
1_OUTB10: D110.3 D126.3 U3.46 | length 1051.4
  Top Layer w10: D126.3@2388.5,-3212.72 2393.43,-3212.72 2406.82,-3199.32 2407.18,-3199.32 2418.59,-3187.91 2418.59,-3071.41 v1(2445,-3045) ; v1(2640,-3005) 2715,-3005 2726.89,-2993.11 ; D110.3@2688.5,-2972.72 2693.43,-2972.72 2713.82,-2993.11 2726.89,-2993.11 ; U3.46@3086.1,-2775.51 3086.1,-2808.9 2983.19,-2911.81 2848.19,-2911.81 2840,-2920 2840,-2985 2831.89,-2993.11 2726.89,-2993.11
  Bottom Layer w10: v1(2445,-3045) 2600,-3045 v1(2640,-3005)
1_OUTB10_1: D78.3 D94.3 U1.46 | length 1051.4
  Top Layer w10: U1.46@903.9,-2034.49 903.9,-2001.1 1006.81,-1898.19 1141.81,-1898.19 1150,-1890 1150,-1825 1158.11,-1816.89 1263.11,-1816.89 ; D78.3@1301.5,-1837.28 1296.57,-1837.28 1276.18,-1816.89 1263.11,-1816.89 ; v1(1350,-1805) 1275,-1805 1263.11,-1816.89 ; v1(1545,-1765) 1571.41,-1738.59 1571.41,-1622.09 1582.82,-1610.68 1583.18,-1610.68 1596.57,-1597.28 D94.3@1601.5,-1597.28
  Bottom Layer w10: v1(1350,-1805) 1390,-1765 v1(1545,-1765)
1_OUTB11: D109.3 D125.3 U3.49 | length 747.8
  Top Layer w10: D125.3@2790,-3175 2792.39,-3172.61 2842.39,-3172.61 v1(2845,-3170) ; D109.3@2891.63,-2972.72 2891.63,-2991.63 ; v1(2915,-3055) 2891.63,-3031.63 2891.63,-2991.63 ; U3.49@3145.16,-2775.51 3145.16,-2854.84 3045,-2955 3045,-2990 2990,-3045 2944.15,-3045 2920,-3020.85 2920,-3020 2891.63,-2991.63
  Bottom Layer w10: v1(2845,-3170) 2915,-3100 v1(2915,-3055)
1_OUTB11_1: D77.3 D93.3 U1.49 | length 747.8
  Top Layer w10: U1.49@844.84,-2034.49 844.84,-1955.16 945,-1855 945,-1820 1000,-1765 1045.85,-1765 1070,-1789.15 1070,-1790 1098.37,-1818.37 ; v1(1075,-1755) 1098.37,-1778.37 1098.37,-1818.37 ; D77.3@1098.37,-1837.28 1098.37,-1818.37 ; v1(1145,-1640) 1147.61,-1637.39 1197.61,-1637.39 D93.3@1200,-1635
  Bottom Layer w10: v1(1075,-1755) 1075,-1710 v1(1145,-1640)
1_OUTB12: D108.3 D124.3 U3.52 | length 581.3
  Top Layer w10: D108.3@3111.76,-2972.72 3111.76,-3021.76 3130,-3040 ; D124.3@3145.5,-3177.28 3145.5,-3055.5 3130,-3040 ; U3.52@3205,-2770 3205,-2840 3230,-2865 3230,-3010 3200,-3040 3130,-3040
1_OUTB12_1: D76.3 D92.3 U1.52 | length 581.3
  Top Layer w10: U1.52@785,-2040 785,-1970 760,-1945 760,-1800 790,-1770 860,-1770 ; D92.3@844.5,-1632.72 844.5,-1754.5 860,-1770 ; D76.3@878.24,-1837.28 878.24,-1788.24 860,-1770
1_OUTB13: D107.3 D123.3 U3.55 | length 507.7
  Top Layer w10: U3.55@3263.27,-2775.51 3263.27,-2810.6 3387.67,-2935 3400,-2935 3400,-2937.49 3414.4,-2951.89 3414.76,-2951.89 3501,-3038.12 D123.3@3501,-3177.28
1_OUTB13_1: D75.3 D91.3 U1.55 | length 507.7
  Top Layer w10: D91.3@489,-1632.72 489,-1771.88 575.24,-1858.11 575.6,-1858.11 590,-1872.51 590,-1875 602.33,-1875 726.73,-1999.4 U1.55@726.73,-2034.49
1_OUTB14: D106.3 D122.3 U3.4 | length 788
  Top Layer w10: U3.4@3310.51,-2688.9 3398.9,-2688.9 3615,-2905 D106.3@3615,-2940 ; D106.3@3615,-2937.28 3652.28,-2937.28 3855,-3140 D122.3@3855,-3175
1_OUTB14_1: D74.3 D90.3 U1.4 | length 788
  Top Layer w10: D90.3@135,-1635 135,-1670 337.72,-1872.72 D74.3@375,-1872.72 ; D74.3@375,-1870 375,-1905 591.1,-2121.1 U1.4@679.49,-2121.1
1_OUTB15: D105.3 D121.3 U3.7 | length 711.4
  Top Layer w10: U3.7@3315,-2630 3315.16,-2629.84 3476.39,-2629.84 3610.08,-2763.53 D105.3@3615,-2763.53 3828.53,-2763.53 3855,-2790 D121.3@3855,-2895
1_OUTB15_1: D73.3 D89.3 U1.7 | length 711.4
  Top Layer w10: D89.3@135,-1915 135,-2020 161.47,-2046.47 D73.3@375,-2046.47 379.92,-2046.47 513.61,-2180.16 674.84,-2180.16 U1.7@675,-2180
1_OUTG0: D97.2 D113.2 U3.9 | length 553.9
  Top Layer w10: U3.9@3310.51,-2590.47 3311.42,-2591.38 3513.62,-2591.38 ; 3520,-2590 3518.62,-2591.38 ; v1(3540,-2565) 3513.62,-2591.38 ; D97.2@3550,-2590 3548.62,-2591.38 3518.62,-2591.38 ; v1(3695,-2595) 3713.86,-2613.86 3792.36,-2613.86 D113.2@3793.5,-2612.72 ; 3513.62,-2591.38 3518.62,-2591.38
  Bottom Layer w10: v1(3540,-2565) 3570,-2595 v1(3695,-2595)
1_OUTG0_1: D65.2 D81.2 U1.9 | length 553.9
  Top Layer w10: D81.2@196.5,-2197.28 197.64,-2196.14 276.14,-2196.14 v1(295,-2215) ; D65.2@440,-2220 441.38,-2218.62 471.38,-2218.62 ; v1(450,-2245) 476.38,-2218.62 ; 470,-2220 471.38,-2218.62 ; U1.9@679.49,-2219.53 678.58,-2218.62 476.38,-2218.62 ; 471.38,-2218.62 476.38,-2218.62
  Bottom Layer w10: v1(295,-2215) 420,-2215 v1(450,-2245)
1_OUTG1: D98.2 D114.2 U3.12 | length 605.4
  Top Layer w10: U3.12@3305,-2530 3350,-2530 3453.53,-2426.47 D98.2@3547.09,-2426.47 ; v1(3535,-2400) 3535,-2403.69 3541.26,-2409.95 3541.26,-2420.64 D98.2@3547.09,-2426.47 ; D98.2@3552.01,-2426.47 D98.2@3547.09,-2426.47 ; v1(3735,-2360) 3759.07,-2335.93 3784.07,-2335.93 D114.2@3790,-2330
  Bottom Layer w10: v1(3535,-2400) 3575,-2360 v1(3735,-2360)
1_OUTG1_1: D66.2 D82.2 U1.12 | length 605.4
  Top Layer w10: D82.2@200,-2480 205.93,-2474.07 230.93,-2474.07 v1(255,-2450) ; D66.2@437.99,-2383.53 D66.2@442.91,-2383.53 ; v1(455,-2410) 455,-2406.31 448.74,-2400.05 448.74,-2389.36 D66.2@442.91,-2383.53 ; U1.12@685,-2280 640,-2280 536.47,-2383.53 D66.2@442.91,-2383.53
  Bottom Layer w10: v1(255,-2450) 415,-2450 v1(455,-2410)
1_OUTG2: D99.2 D115.2 U3.15 | length 706
  Top Layer w10: U3.15@3285,-2470 3285,-2445 3300,-2430 3350,-2430 3522.28,-2257.72 D99.2@3552.01,-2257.72 ; D99.2@3555,-2260 3557.39,-2257.61 3557.39,-2227.61 v1(3560,-2225) ; 3657.61,-2177.9 3774.83,-2060.68 3775.62,-2060.68 3788.58,-2047.72 D115.2@3793.5,-2047.72
  Bottom Layer w10: v1(3560,-2225) 3620,-2225 v1(3655,-2190)
1_OUTG2_1: D67.2 D83.2 U1.15 | length 706
  Top Layer w10: D83.2@196.5,-2762.28 201.42,-2762.28 214.38,-2749.32 215.17,-2749.32 332.39,-2632.1 ; v1(430,-2585) 432.61,-2582.39 432.61,-2552.39 D67.2@435,-2550 ; D67.2@437.99,-2552.28 467.72,-2552.28 640,-2380 690,-2380 705,-2365 U1.15@705,-2340
  Bottom Layer w10: v1(335,-2620) 370,-2585 v1(430,-2585)
1_OUTG3: D100.2 D116.2 U3.18 | length 544.3
  Top Layer w10: U3.18@3225,-2470 3225,-2358.88 3313.2,-2270.68 3314,-2270.68 3326.96,-2257.72 D100.2@3331.88,-2257.72 ; D100.2@3330,-2260 3334.52,-2260 3357.39,-2237.13 3357.39,-2227.61 v1(3360,-2225) ; v1(3430,-2200) 3430,-2157.86 3505.57,-2082.28 D116.2@3510.5,-2082.28
  Bottom Layer w10: v1(3360,-2225) 3405,-2225 v1(3430,-2200)
1_OUTG3_1: D68.2 D84.2 U1.18 | length 544.3
  Top Layer w10: D84.2@479.5,-2727.72 484.43,-2727.72 560,-2652.14 v1(560,-2610) ; v1(630,-2585) 632.61,-2582.39 632.61,-2572.87 655.48,-2550 D68.2@660,-2550 ; D68.2@658.12,-2552.28 663.04,-2552.28 676,-2539.32 676.8,-2539.32 765,-2451.12 U1.18@765,-2340
  Bottom Layer w10: v1(560,-2610) 585,-2585 v1(630,-2585)
1_OUTG4: D101.2 D117.2 U3.21 | length 453.5
  Top Layer w10: D117.2@3155,-2085 3149.86,-2085 3146.75,-2088.11 3146.75,-2093.25 3111.76,-2128.24 D101.2@3111.76,-2257.72 3106.83,-2257.72 3093.87,-2270.68 3093.08,-2270.68 3085,-2278.76 3085,-2333.92 3164.84,-2413.76 U3.21@3164.84,-2464.49 3164.84,-2469.84 U3.21@3165,-2470
1_OUTG4_1: D69.2 D85.2 U1.21 | length 445.7
  Top Layer w10: U1.21@825.16,-2345.51 825.16,-2396.24 905,-2476.08 905,-2531.24 896.92,-2539.32 896.13,-2539.32 883.17,-2552.28 D69.2@878.24,-2552.28 881.81,-2555.85 881.81,-2678.19 843.25,-2716.75 843.25,-2721.89 D85.2@840.14,-2725
1_OUTG5: D102.2 D118.2 U3.24 | length 611
  Top Layer w10: D118.2@2804.5,-2082.28 2817.28,-2082.28 2878.19,-2143.19 2878.19,-2234.03 2880.88,-2236.73 2880.88,-2251.89 2883.99,-2255 2889.43,-2255 2886.71,-2257.72 2872.54,-2271.89 2871.63,-2271.89 2855,-2288.52 2855,-2296.8 2918.2,-2360 3027.94,-2360 3104.88,-2436.94 3104.88,-2463.58 U3.24@3105.79,-2464.49
1_OUTG5_1: D70.2 D86.2 U1.24 | length 616.6
  Top Layer w10: U1.24@884.21,-2345.51 885.12,-2346.42 885.12,-2373.06 962.06,-2450 1071.8,-2450 1135,-2513.2 1135,-2521.48 1118.37,-2538.11 1117.46,-2538.11 D70.2@1100.57,-2555 ; D70.2@1095,-2555 D70.2@1100.57,-2555 ; D86.2@1185.5,-2727.72 1172.72,-2727.72 1109.12,-2664.12 1109.12,-2558.11 1106.01,-2555 D70.2@1100.57,-2555
1_OUTG6: D103.2 D119.2 U3.31 | length 871
  Top Layer w10: D119.2@2451.5,-2082.28 2456.42,-2082.28 2564.13,-2190 v1(2640,-2190) ; D103.2@2750,-2290 2750,-2328.08 2790.96,-2369.04 ; v1(2810,-2345) 2790.96,-2364.04 2790.96,-2369.04 ; U3.31@2999.49,-2531.42 2953.34,-2531.42 2790.96,-2369.04
  Bottom Layer w10: v1(2640,-2190) 2792.39,-2342.39 2807.39,-2342.39 v1(2810,-2345)
1_OUTG6_1: D71.2 D87.2 U1.31 | length 871
  Top Layer w10: U1.31@990.51,-2278.58 1036.66,-2278.58 1199.04,-2440.96 ; v1(1180,-2465) 1199.04,-2445.96 1199.04,-2440.96 ; D71.2@1240,-2520 1240,-2481.92 1199.04,-2440.96 ; v1(1350,-2620) 1425.87,-2620 1533.58,-2727.72 D87.2@1538.5,-2727.72
  Bottom Layer w10: v1(1180,-2465) 1182.61,-2467.61 1197.61,-2467.61 v1(1350,-2620)
1_OUTG7: D104.2 D120.2 U3.34 | length 753.5
  Top Layer w10: D120.2@2451.5,-2364.78 2589.78,-2364.78 v1(2625,-2400) ; D104.2@2751.5,-2466.03 2816.03,-2466.03 2840,-2490 ; v1(2795,-2500) 2830,-2500 2840,-2490 ; U3.34@3005,-2590 2940,-2590 2840,-2490
  Bottom Layer w10: v1(2625,-2400) 2725,-2500 v1(2795,-2500)
1_OUTG7_1: D72.2 D88.2 U1.34 | length 753.5
  Top Layer w10: U1.34@985,-2220 1050,-2220 1150,-2320 ; v1(1195,-2310) 1160,-2310 1150,-2320 ; D72.2@1238.5,-2343.97 1173.97,-2343.97 1150,-2320 ; v1(1365,-2410) 1400.22,-2445.22 D88.2@1538.5,-2445.22
  Bottom Layer w10: v1(1195,-2310) 1265,-2310 v1(1365,-2410)
1_OUTG8: D112.2 D128.2 U3.37 | length 664.9
  Top Layer w10: D128.2@2451.5,-2647.28 2452.85,-2648.64 2588.64,-2648.64 v1(2590,-2650) ; D112.2@2755,-2630 2755,-2633.37 2771.16,-2649.53 2839.53,-2649.53 ; v1(2815,-2625) 2839.53,-2649.53 ; 2840,-2650 2839.53,-2649.53 ; U3.37@2999.49,-2649.53 2839.53,-2649.53
  Bottom Layer w10: v1(2590,-2650) 2790,-2650 v1(2815,-2625)
1_OUTG8_1: D80.2 D96.2 U1.37 | length 664.9
  Top Layer w10: U1.37@990.51,-2160.47 1150.47,-2160.47 ; 1150,-2160 1150.47,-2160.47 ; v1(1175,-2185) 1150.47,-2160.47 ; D80.2@1235,-2180 1235,-2176.63 1218.84,-2160.47 1150.47,-2160.47 ; v1(1400,-2160) 1401.36,-2161.36 1537.15,-2161.36 D96.2@1538.5,-2162.72
  Bottom Layer w10: v1(1175,-2185) 1200,-2160 v1(1400,-2160)
1_OUTG9: D111.2 D127.2 U3.40 | length 728.7
  Top Layer w10: D127.2@2451.5,-2929.78 2515.22,-2929.78 v1(2640,-2805) ; D111.2@2751.5,-2803.53 2756.84,-2798.19 2766.81,-2798.19 2790,-2775 ; v1(2790,-2820) 2790,-2775 ; U3.40@2999.49,-2708.58 2856.42,-2708.58 2790,-2775
  Bottom Layer w10: v1(2640,-2805) 2771.31,-2805 2786.31,-2820 v1(2790,-2820)
1_OUTG9_1: D79.2 D95.2 U1.40 | length 709.9
  Top Layer w10: U1.40@990.51,-2101.42 1069.89,-2101.42 1159.5,-2011.81 1233.16,-2011.81 D79.2@1238.5,-2006.47 ; 1185,-2010 1185,-2008.69 1200,-1993.69 v1(1200,-1990) ; v1(1350,-2005) 1474.78,-1880.22 D95.2@1538.5,-1880.22
  Bottom Layer w10: v1(1200,-1990) 1203.69,-1990 1218.69,-2005 v1(1350,-2005)
1_OUTG10: D110.2 D126.2 U3.45 | length 935.9
  Top Layer w10: D126.2@2450,-3215 2457.39,-3207.61 2507.39,-3207.61 v1(2510,-3205) ; D110.2@2755,-2970 2758.7,-2970 2770.59,-2958.11 2771.39,-2958.11 2788.62,-2940.87 2788.62,-2920 ; v1(2815,-2950) 2815,-2946.38 2788.62,-2920 ; U3.45@3066.42,-2775.51 3065.51,-2776.42 3065.51,-2796.02 2964.73,-2896.81 2804.05,-2896.81 2788.62,-2912.24 2788.62,-2920
  Bottom Layer w10: v1(2510,-3205) 2560,-3205 v1(2815,-2950)
1_OUTG10_1: D78.2 D94.2 U1.45 | length 935.9
  Top Layer w10: U1.45@923.58,-2034.49 924.49,-2033.58 924.49,-2013.98 1025.27,-1913.19 1185.95,-1913.19 1201.38,-1897.76 1201.38,-1890 ; v1(1175,-1860) 1175,-1863.62 1201.38,-1890 ; D78.2@1235,-1840 1231.3,-1840 1219.41,-1851.89 1218.61,-1851.89 1201.38,-1869.13 1201.38,-1890 ; v1(1480,-1605) 1482.61,-1602.39 1532.61,-1602.39 D94.2@1540,-1595
  Bottom Layer w10: v1(1175,-1860) 1430,-1605 v1(1480,-1605)
1_OUTG11: D109.2 D125.2 U3.48 | length 689.6
  Top Layer w10: D125.2@2727,-3177.72 2731.93,-3177.72 2829.64,-3080 v1(2960,-3080) ; v1(2950,-3020) 2952.61,-3017.39 2952.61,-3000.5 2955,-2998.11 D109.2@2955,-2970 ; D109.2@2950,-2970 2953.54,-2966.46 3009.39,-2966.46 3125.47,-2850.37 U3.48@3125.47,-2775.51
  Bottom Layer w10: v1(2950,-3020) 2950,-3023.69 2960,-3033.69 v1(2960,-3080)
1_OUTG11_1: D77.2 D93.2 U1.48 | length 689.6
  Top Layer w10: U1.48@864.53,-2034.49 864.53,-1959.63 980.61,-1843.54 1036.46,-1843.54 D77.2@1040,-1840 ; v1(1030,-1730) 1160.36,-1730 1258.07,-1632.28 D93.2@1263,-1632.28 ; D77.2@1035,-1840 1035,-1811.89 1037.39,-1809.5 1037.39,-1792.61 v1(1040,-1790)
  Bottom Layer w10: v1(1030,-1730) 1030,-1776.31 1040,-1786.31 v1(1040,-1790)
1_OUTG12: D108.2 D124.2 U3.51 | length 489.1
  Top Layer w10: D124.2@3082.5,-3177.72 3084.17,-3177.72 3090,-3171.89 v1(3090,-3065) ; v1(3185,-3015) 3185,-2980 3205,-2960 3205,-2870 3185,-2850 U3.51@3185,-2775
  Bottom Layer w10: v1(3090,-3065) 3140,-3015 v1(3185,-3015)